# Altium PCB DDR4-UDIMM — 16 GB DDR4.PcbDoc (part 2 of 2)
Units mm, origin at the board's own origin, x right, y up, seen from the top; angles counter-clockwise.
Board outline 133.35 x 31.25 mm, 8 copper layers (Top Layer 1, L2_PWR_GND, L3_DQ_ADDR, L4_VDD, L5_ADDR, L6_ADDR_CK, L7_PWR_GND, Bottom Layer 1), stack 1.398 mm thick; 206 components, 228 nets, 1312 pads, 481 vias.
Unrouted connection lines stored in the file: 1002.
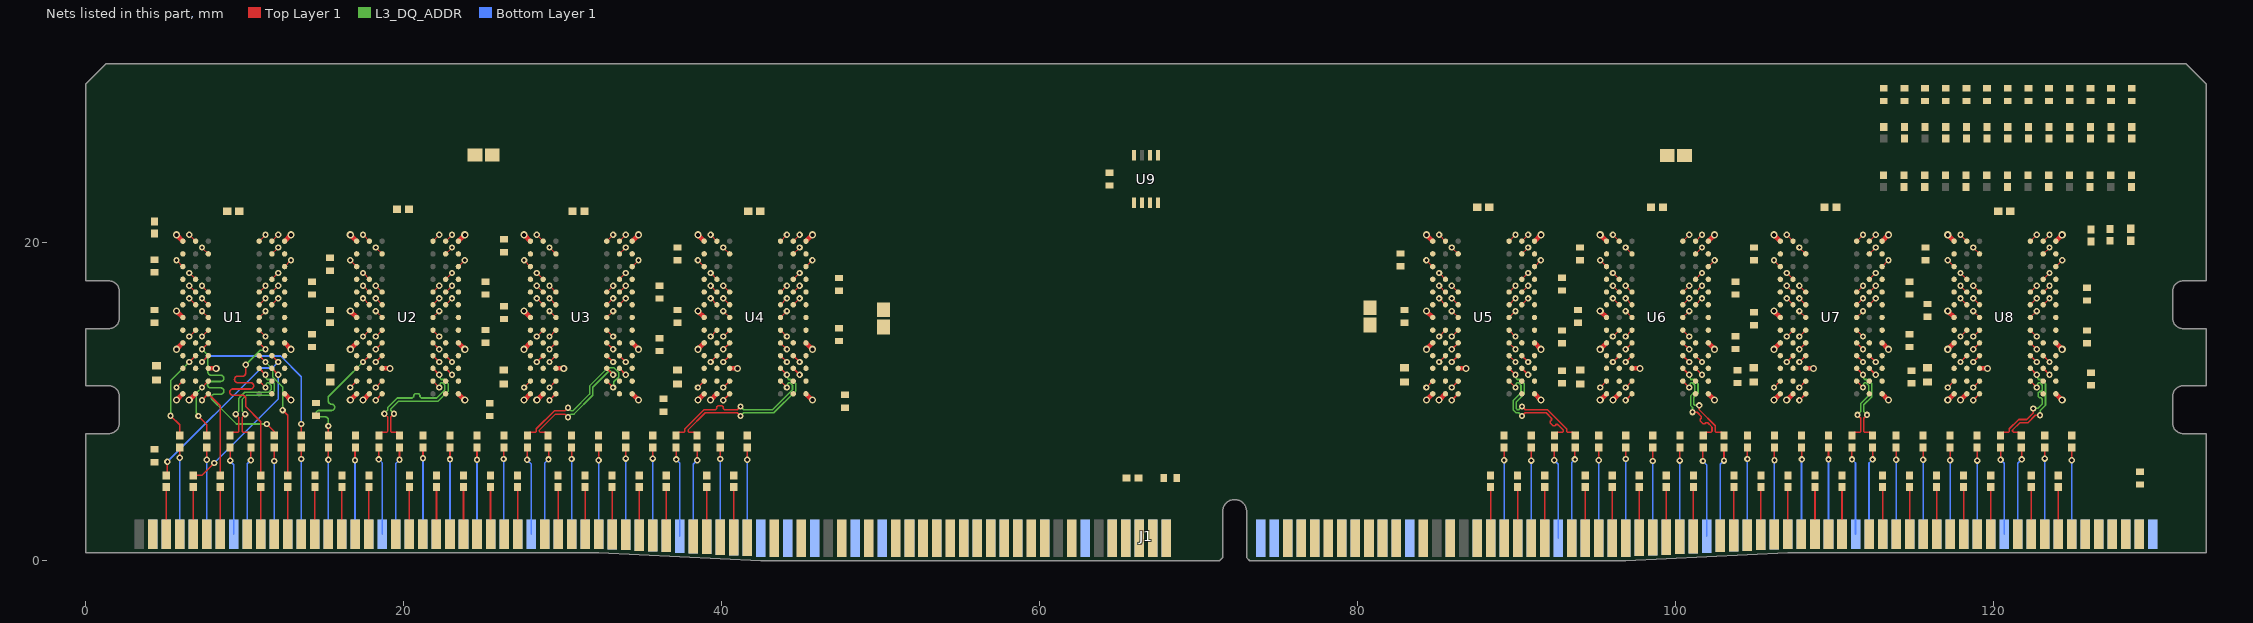
[diagram p4: the nets of this part, all layers, seen from the top]

## Via types
v1: diameter 0.4, hole 0.2, Top Layer 1 to Bottom Layer 1, tented both sides, 409 vias
v2: diameter 0.45, hole 0.25, Top Layer 1 to Bottom Layer 1, tented both sides, 72 vias

## Nets (pads, with @x,y where several pads share a name; then routed paths per layer and width w, separated by ;. In a path a pad name is that pad's centre, name@x,y a point inside that pad or via, vN(x,y) a via of type N, cw(c..) or ccw(c..) an arc to the next point about the centre after c; other vN are vias at no path point) (continued)
A8: J1.68 R116.1 U1.M2 U2.M2 U3.M2 U4.M2 U5.M2 U6.M2 U7.M2 U8.M2 | length 4.5
  Top Layer 1 w0.075: U1.M2@11.7,19.3 v1(12.1,19.7) ; U2.M2@22.63,19.3 v1(23.03,19.7) ; U3.M2@33.56,19.3 v1(33.96,19.7) ; U4.M2@44.49,19.3 v1(44.89,19.7) ; U5.M2@90.31,19.3 v1(90.71,19.7) ; U6.M2@101.24,19.3 v1(101.64,19.7) ; U7.M2@112.17,19.3 v1(112.57,19.7) ; U8.M2@123.1,19.3 v1(123.5,19.7)
A9: J1.66 R119.1 U1.M7 U2.M7 U3.M7 U4.M7 U5.M7 U6.M7 U7.M7 U8.M7 | length 4.5
  Top Layer 1 w0.075: v1(7.3,19.7) U1.M7@7.7,19.3 ; v1(18.23,19.7) U2.M7@18.63,19.3 ; v1(29.16,19.7) U3.M7@29.56,19.3 ; v1(40.09,19.7) U4.M7@40.49,19.3 ; v1(85.91,19.7) U5.M7@86.31,19.3 ; v1(96.84,19.7) U6.M7@97.24,19.3 ; v1(107.77,19.7) U7.M7@108.17,19.3 ; v1(118.7,19.7) U8.M7@119.1,19.3
A10_AP: J1.225 R121.1 U1.J3 U2.J3 U3.J3 U4.J3 U5.J3 U6.J3 U7.J3 U8.J3 | length 4.5
  Top Layer 1 w0.075: U1.J3@10.9,16.9 v1(11.3,17.3) ; U2.J3@21.83,16.9 v1(22.23,17.3) ; U3.J3@32.76,16.9 v1(33.16,17.3) ; U4.J3@43.69,16.9 v1(44.09,17.3) ; U5.J3@89.51,16.9 v1(89.91,17.3) ; U6.J3@100.44,16.9 v1(100.84,17.3) ; U7.J3@111.37,16.9 v1(111.77,17.3) ; U8.J3@122.3,16.9 v1(122.7,17.3)
A11: J1.210 R122.1 U1.N2 U2.N2 U3.N2 U4.N2 U5.N2 U6.N2 U7.N2 U8.N2 | length 4.5
  Top Layer 1 w0.075: U1.N2@11.7,20.1 v1(12.1,20.5) ; U2.N2@22.63,20.1 v1(23.03,20.5) ; U3.N2@33.56,20.1 v1(33.96,20.5) ; U4.N2@44.49,20.1 v1(44.89,20.5) ; U5.N2@90.31,20.1 v1(90.71,20.5) ; U6.N2@101.24,20.1 v1(101.64,20.5) ; U7.N2@112.17,20.1 v1(112.57,20.5) ; U8.N2@123.1,20.1 v1(123.5,20.5)
A12_BC: J1.65 R123.1 U1.J7 U2.J7 U3.J7 U4.J7 U5.J7 U6.J7 U7.J7 U8.J7 | length 4.5
  Top Layer 1 w0.075: v1(7.3,17.3) U1.J7@7.7,16.9 ; v1(18.23,17.3) U2.J7@18.63,16.9 ; v1(29.16,17.3) U3.J7@29.56,16.9 ; v1(40.09,17.3) U4.J7@40.49,16.9 ; v1(85.91,17.3) U5.J7@86.31,16.9 ; v1(96.84,17.3) U6.J7@97.24,16.9 ; v1(107.77,17.3) U7.J7@108.17,16.9 ; v1(118.7,17.3) U8.J7@119.1,16.9
A13: J1.232 R124.1 U1.N8 U2.N8 U3.N8 U4.N8 U5.N8 U6.N8 U7.N8 U8.N8 | length 4.5
  Top Layer 1 w0.075: v1(6.5,20.5) U1.N8@6.9,20.1 ; v1(17.43,20.5) U2.N8@17.83,20.1 ; v1(28.36,20.5) U3.N8@28.76,20.1 ; v1(39.29,20.5) U4.N8@39.69,20.1 ; v1(85.11,20.5) U5.N8@85.51,20.1 ; v1(96.04,20.5) U6.N8@96.44,20.1 ; v1(106.97,20.5) U7.N8@107.37,20.1 ; v1(117.9,20.5) U8.N8@118.3,20.1
A15_CAS: J1.86 R111.1 U1.H7 U2.H7 U3.H7 U4.H7 U5.H7 U6.H7 U7.H7 U8.H7 | length 4.5
  Top Layer 1 w0.075: v1(7.3,16.5) U1.H7@7.7,16.1 ; v1(18.23,16.5) U2.H7@18.63,16.1 ; v1(29.16,16.5) U3.H7@29.56,16.1 ; v1(40.09,16.5) U4.H7@40.49,16.1 ; v1(85.91,16.5) U5.H7@86.31,16.1 ; v1(96.84,16.5) U6.H7@97.24,16.1 ; v1(107.77,16.5) U7.H7@108.17,16.1 ; v1(118.7,16.5) U8.H7@119.1,16.1
A16_RAS: J1.82 R113.1 U1.H8 U2.H8 U3.H8 U4.H8 U5.H8 U6.H8 U7.H8 U8.H8 | length 4.5
  Top Layer 1 w0.075: v1(6.5,16.5) U1.H8@6.9,16.1 ; v1(17.43,16.5) U2.H8@17.83,16.1 ; v1(28.36,16.5) U3.H8@28.76,16.1 ; v1(39.29,16.5) U4.H8@39.69,16.1 ; v1(85.11,16.5) U5.H8@85.51,16.1 ; v1(96.04,16.5) U6.H8@96.44,16.1 ; v1(106.97,16.5) U7.H8@107.37,16.1 ; v1(117.9,16.5) U8.H8@118.3,16.1
ACT: J1.62 R125.1 U1.H3 U2.H3 U3.H3 U4.H3 U5.H3 U6.H3 U7.H3 U8.H3 | length 4.5
  Top Layer 1 w0.075: U1.H3@10.9,16.1 v1(11.3,16.5) ; U2.H3@21.83,16.1 v1(22.23,16.5) ; U3.H3@32.76,16.1 v1(33.16,16.5) ; U4.H3@43.69,16.1 v1(44.09,16.5) ; U5.H3@89.51,16.1 v1(89.91,16.5) ; U6.H3@100.44,16.1 v1(100.84,16.5) ; U7.H3@111.37,16.1 v1(111.77,16.5) ; U8.H3@122.3,16.1 v1(122.7,16.5)
ALERT_n: J1.208 R102.1 U1.L9 U2.L9 U3.L9 U4.L9 U5.L9 U6.L9 U7.L9 U8.L9 | length 4.5
  Top Layer 1 w0.075: v1(5.7,18.9) U1.L9@6.1,18.5 ; v1(16.63,18.9) U2.L9@17.03,18.5 ; v1(27.56,18.9) U3.L9@27.96,18.5 ; v1(38.49,18.9) U4.L9@38.89,18.5 ; v1(84.31,18.9) U5.L9@84.71,18.5 ; v1(95.24,18.9) U6.L9@95.64,18.5 ; v1(106.17,18.9) U7.L9@106.57,18.5 ; v1(117.1,18.9) U8.L9@117.5,18.5
BA0: J1.81 R118.1 U1.K2 U2.K2 U3.K2 U4.K2 U5.K2 U6.K2 U7.K2 U8.K2 | length 4.5
  Top Layer 1 w0.075: U1.K2@11.7,17.7 v1(12.1,18.1) ; U2.K2@22.63,17.7 v1(23.03,18.1) ; U3.K2@33.56,17.7 v1(33.96,18.1) ; U4.K2@44.49,17.7 v1(44.89,18.1) ; U5.K2@90.31,17.7 v1(90.71,18.1) ; U6.K2@101.24,17.7 v1(101.64,18.1) ; U7.K2@112.17,17.7 v1(112.57,18.1) ; U8.K2@123.1,17.7 v1(123.5,18.1)
BA1: J1.224 R120.1 U1.K8 U2.K8 U3.K8 U4.K8 U5.K8 U6.K8 U7.K8 U8.K8 | length 4.5
  Top Layer 1 w0.075: v1(6.5,18.1) U1.K8@6.9,17.7 ; v1(17.43,18.1) U2.K8@17.83,17.7 ; v1(28.36,18.1) U3.K8@28.76,17.7 ; v1(39.29,18.1) U4.K8@39.69,17.7 ; v1(85.11,18.1) U5.K8@85.51,17.7 ; v1(96.04,18.1) U6.K8@96.44,17.7 ; v1(106.97,18.1) U7.K8@107.37,17.7 ; v1(117.9,18.1) U8.K8@118.3,17.7
BG0: J1.63 R99.1 U1.J2 U2.J2 U3.J2 U4.J2 U5.J2 U6.J2 U7.J2 U8.J2 | length 4.5
  Top Layer 1 w0.075: U1.J2@11.7,16.9 v1(12.1,17.3) ; U2.J2@22.63,16.9 v1(23.03,17.3) ; U3.J2@33.56,16.9 v1(33.96,17.3) ; U4.J2@44.49,16.9 v1(44.89,17.3) ; U5.J2@90.31,16.9 v1(90.71,17.3) ; U6.J2@101.24,16.9 v1(101.64,17.3) ; U7.J2@112.17,16.9 v1(112.57,17.3) ; U8.J2@123.1,16.9 v1(123.5,17.3)
BG1: J1.207 R98.1 U1.J8 U2.J8 U3.J8 U4.J8 U5.J8 U6.J8 U7.J8 U8.J8 | length 4.5
  Top Layer 1 w0.075: v1(6.5,17.3) U1.J8@6.9,16.9 ; v1(17.43,17.3) U2.J8@17.83,16.9 ; v1(28.36,17.3) U3.J8@28.76,16.9 ; v1(39.29,17.3) U4.J8@39.69,16.9 ; v1(85.11,17.3) U5.J8@85.51,16.9 ; v1(96.04,17.3) U6.J8@96.44,16.9 ; v1(106.97,17.3) U7.J8@107.37,16.9 ; v1(117.9,17.3) U8.J8@118.3,16.9
CK0_C: J1.75 R117.1 U1.F8 U2.F8 U3.F8 U4.F8 U5.F8 U6.F8 U7.F8 U8.F8 | length 4.5
  Top Layer 1 w0.075: v1(6.5,14.1) U1.F8@6.9,14.5 ; v1(17.43,14.1) U2.F8@17.83,14.5 ; v1(28.36,14.1) U3.F8@28.76,14.5 ; v1(39.29,14.1) U4.F8@39.69,14.5 ; v1(85.11,14.1) U5.F8@85.51,14.5 ; v1(96.04,14.1) U6.F8@96.44,14.5 ; v1(106.97,14.1) U7.F8@107.37,14.5 ; v1(117.9,14.1) U8.F8@118.3,14.5
CK0_T: J1.74 R115.1 U1.F7 U2.F7 U3.F7 U4.F7 U5.F7 U6.F7 U7.F7 U8.F7 | length 4.5
  Top Layer 1 w0.075: v1(7.3,14.1) U1.F7@7.7,14.5 ; v1(18.23,14.1) U2.F7@18.63,14.5 ; v1(29.16,14.1) U3.F7@29.56,14.5 ; v1(40.09,14.1) U4.F7@40.49,14.5 ; v1(85.91,14.1) U5.F7@86.31,14.5 ; v1(96.84,14.1) U6.F7@97.24,14.5 ; v1(107.77,14.1) U7.F7@108.17,14.5 ; v1(118.7,14.1) U8.F7@119.1,14.5
CK1_C: J1.219 R106.2
CK1_T: J1.218 R106.1
CKE: J1.60 R104.1 U1.G3 U2.G3 U3.G3 U4.G3 U5.G3 U6.G3 U7.G3 U8.G3 | length 4.5
  Top Layer 1 w0.075: U1.G3@10.9,15.3 v1(11.3,15.7) ; U2.G3@21.83,15.3 v1(22.23,15.7) ; U3.G3@32.76,15.3 v1(33.16,15.7) ; U4.G3@43.69,15.3 v1(44.09,15.7) ; U5.G3@89.51,15.3 v1(89.91,15.7) ; U6.G3@100.44,15.3 v1(100.84,15.7) ; U7.G3@111.37,15.3 v1(111.77,15.7) ; U8.G3@122.3,15.3 v1(122.7,15.7)
CS: J1.84 R101.1 U1.G7 U2.G7 U3.G7 U4.G7 U5.G7 U6.G7 U7.G7 U8.G7 | length 4.5
  Top Layer 1 w0.075: v1(7.3,15.7) U1.G7@7.7,15.3 ; v1(18.23,15.7) U2.G7@18.63,15.3 ; v1(29.16,15.7) U3.G7@29.56,15.3 ; v1(40.09,15.7) U4.G7@40.49,15.3 ; v1(85.91,15.7) U5.G7@86.31,15.3 ; v1(96.84,15.7) U6.G7@97.24,15.3 ; v1(107.77,15.7) U7.G7@108.17,15.3 ; v1(118.7,15.7) U8.G7@119.1,15.3
DM0: J1.7 R11.2 | length 2.9
  Top Layer 1 w0.1: J1.7@8.45,1.675 R11.2@8.45,4.625
DM1: J1.18 R23.2 | length 2.9
  Top Layer 1 w0.1: J1.18@17.8,1.675 R23.2@17.8,4.625
DM2: J1.29 R35.2 | length 2.9
  Top Layer 1 w0.1: J1.29@27.15,1.675 R35.2@27.15,4.625
DM3: J1.40 R47.2 | length 3.1
  Top Layer 1 w0.1: J1.40@36.5,1.571 R47.2@36.5,4.625
DM4: J1.99 R59.2 | length 3.2
  Top Layer 1 w0.1: J1.99@91.75,1.425 R59.2@91.75,4.625
DM5: J1.110 R71.2 | length 3.1
  Top Layer 1 w0.1: J1.110@101.1,1.529 R71.2@101.1,4.625
DM6: J1.121 R83.2 | length 2.9
  Top Layer 1 w0.1: J1.121@110.45,1.675 R83.2@110.45,4.625
DM7: J1.132 R95.2 | length 2.9
  Top Layer 1 w0.1: J1.132@119.8,1.675 R95.2@119.8,4.625
DQ0: J1.5 R2.2 | length 2.9
  Top Layer 1 w0.1: J1.5@6.75,1.675 R2.2@6.75,4.625
DQ1: J1.150 R3.2 | length 5.4
  Top Layer 1 w0.1: v1(7.6,6.35) R3.2@7.6,7.125
  Bottom Layer 1 w0.1: J1.150@7.6,1.675 v1(7.6,6.35)
DQ2: J1.12 R4.2 | length 2.9
  Top Layer 1 w0.1: J1.12@12.7,1.675 R4.2@12.7,4.625
DQ3: J1.157 R5.2 | length 5.4
  Top Layer 1 w0.1: v1(13.55,6.4) R5.2@13.55,7.125
  Bottom Layer 1 w0.1: J1.157@13.55,1.675 v1(13.55,6.4)
DQ4: J1.3 R6.2 | length 2.9
  Top Layer 1 w0.1: J1.3@5.05,1.675 R6.2@5.05,4.625
DQ5: J1.148 R12.2 | length 5.4
  Top Layer 1 w0.1: v1(5.9,6.475) R12.2@5.9,7.125
  Bottom Layer 1 w0.1: J1.148@5.9,1.675 v1(5.9,6.475)
DQ6: J1.10 R7.2 | length 2.9
  Top Layer 1 w0.1: J1.10@11,1.675 R7.2@11,4.625
DQ7: J1.155 R8.2 | length 5.4
  Top Layer 1 w0.1: v1(11.85,6.275) R8.2@11.85,7.125
  Bottom Layer 1 w0.1: J1.155@11.85,1.675 v1(11.85,6.275)
DQ8: J1.16 R14.2 | length 2.9
  Top Layer 1 w0.1: J1.16@16.1,1.675 R14.2@16.1,4.625
DQ9: J1.161 R15.2 | length 5.5
  Top Layer 1 w0.1: v1(16.925,6.325) 16.925,7.1 R15.2@16.95,7.125
  Bottom Layer 1 w0.1: v1(16.925,6.325) 16.925,1.7 J1.161@16.95,1.675
DQ10: J1.23 R16.2 | length 2.9
  Top Layer 1 w0.1: J1.23@22.05,1.675 R16.2@22.05,4.625
DQ11: J1.168 R17.2 | length 5.4
  Top Layer 1 w0.1: v1(22.9,6.375) R17.2@22.9,7.125
  Bottom Layer 1 w0.1: J1.168@22.9,1.675 v1(22.9,6.375)
DQ12: J1.14 R18.2 | length 2.9
  Top Layer 1 w0.1: J1.14@14.4,1.675 R18.2@14.4,4.625
DQ13: J1.159 R24.2 | length 5.4
  Top Layer 1 w0.1: v1(15.25,6.35) R24.2@15.25,7.125
  Bottom Layer 1 w0.1: J1.159@15.25,1.675 v1(15.25,6.35)
DQ14: J1.21 R19.2 | length 2.9
  Top Layer 1 w0.1: J1.21@20.35,1.675 R19.2@20.35,4.625
DQ15: J1.166 R20.2 | length 5.4
  Top Layer 1 w0.1: v1(21.2,6.45) R20.2@21.2,7.125
  Bottom Layer 1 w0.1: J1.166@21.2,1.675 v1(21.2,6.45)
DQ16: J1.27 R26.2 | length 2.9
  Top Layer 1 w0.1: J1.27@25.45,1.675 R26.2@25.45,4.625
DQ17: J1.172 R27.2 | length 5.5
  Top Layer 1 w0.1: v1(26.275,6.4) 26.275,7.1 R27.2@26.3,7.125
  Bottom Layer 1 w0.1: v1(26.275,6.4) 26.275,1.7 J1.172@26.3,1.675
DQ18: J1.34 R28.2 | length 2.9
  Top Layer 1 w0.1: J1.34@31.4,1.675 R28.2@31.4,4.625
DQ19: J1.179 R29.2 | length 5.4
  Top Layer 1 w0.1: v1(32.25,6.325) R29.2@32.25,7.125
  Bottom Layer 1 w0.1: J1.179@32.25,1.675 v1(32.25,6.325)
DQ20: J1.25 R30.2 | length 2.9
  Top Layer 1 w0.1: J1.25@23.75,1.675 R30.2@23.75,4.625
DQ21: J1.170 R36.2 | length 5.4
  Top Layer 1 w0.1: v1(24.6,6.35) R36.2@24.6,7.125
  Bottom Layer 1 w0.1: J1.170@24.6,1.675 v1(24.6,6.35)
DQ22: J1.32 R31.2 | length 2.9
  Top Layer 1 w0.1: J1.32@29.7,1.675 R31.2@29.7,4.625
DQ23: J1.177 R32.2 | length 5.4
  Top Layer 1 w0.1: v1(30.55,6.4) R32.2@30.55,7.125
  Bottom Layer 1 w0.1: J1.177@30.55,1.675 v1(30.55,6.4)
DQ24: J1.38 R38.2 | length 3
  Top Layer 1 w0.1: J1.38@34.8,1.613 R38.2@34.8,4.625
DQ25: J1.183 R39.2 | length 5.5
  Top Layer 1 w0.1: v1(35.65,6.425) R39.2@35.65,7.125
  Bottom Layer 1 w0.1: J1.183@35.65,1.592 v1(35.65,6.425)
DQ26: J1.45 R40.2 | length 3.2
  Top Layer 1 w0.1: J1.45@40.75,1.467 R40.2@40.75,4.625
DQ27: J1.190 R41.2 | length 5.7
  Top Layer 1 w0.1: v1(41.6,6.35) R41.2@41.6,7.125
  Bottom Layer 1 w0.1: J1.190@41.6,1.446 v1(41.6,6.35)
DQ28: J1.36 R42.2 | length 3
  Top Layer 1 w0.1: J1.36@33.1,1.654 R42.2@33.1,4.625
DQ29: J1.181 R48.2 | length 5.5
  Top Layer 1 w0.1: v1(33.95,6.425) R48.2@33.95,7.125
  Bottom Layer 1 w0.1: J1.181@33.95,1.633 v1(33.95,6.425)
DQ30: J1.43 R43.2 | length 3.1
  Top Layer 1 w0.1: J1.43@39.05,1.508 R43.2@39.05,4.625
DQ31: J1.188 R44.2 | length 5.6
  Top Layer 1 w0.1: v1(39.9,6.4) R44.2@39.9,7.125
  Bottom Layer 1 w0.1: J1.188@39.9,1.488 v1(39.9,6.4)
DQ32: J1.97 R50.2 | length 3.2
  Top Layer 1 w0.1: J1.97@90.05,1.425 R50.2@90.05,4.625
DQ33: J1.242 R51.2 | length 5.7
  Top Layer 1 w0.1: v1(90.9,6.3) R51.2@90.9,7.125
  Bottom Layer 1 w0.1: J1.242@90.9,1.425 v1(90.9,6.3)
DQ34: J1.104 R52.2 | length 3.2
  Top Layer 1 w0.1: J1.104@96,1.425 R52.2@96,4.625
DQ35: J1.249 R53.2 | length 5.7
  Top Layer 1 w0.1: v1(96.85,6.4) R53.2@96.85,7.125
  Bottom Layer 1 w0.1: J1.249@96.85,1.425 v1(96.85,6.4)
DQ36: J1.95 R54.2 | length 3.2
  Top Layer 1 w0.1: J1.95@88.35,1.425 R54.2@88.35,4.625
DQ37: J1.240 R60.2 | length 5.7
  Top Layer 1 w0.1: v1(89.2,6.325) R60.2@89.2,7.125
  Bottom Layer 1 w0.1: J1.240@89.2,1.425 v1(89.2,6.325)
DQ38: J1.102 R55.2 | length 3.2
  Top Layer 1 w0.1: J1.102@94.3,1.425 R55.2@94.3,4.625
DQ39: J1.247 R56.2 | length 5.7
  Top Layer 1 w0.1: v1(95.15,6.325) R56.2@95.15,7.125
  Bottom Layer 1 w0.1: J1.247@95.15,1.425 v1(95.15,6.325)
DQ40: J1.108 R62.2 | length 3.1
  Top Layer 1 w0.1: J1.108@99.4,1.488 R62.2@99.4,4.625
DQ41: J1.253 R63.2 | length 5.6
  Top Layer 1 w0.1: v1(100.25,6.3) R63.2@100.25,7.125
  Bottom Layer 1 w0.1: J1.253@100.25,1.508 v1(100.25,6.3)
DQ42: J1.115 R64.2 | length 3
  Top Layer 1 w0.1: J1.115@105.35,1.633 R64.2@105.35,4.625
DQ43: J1.260 R65.2 | length 5.5
  Top Layer 1 w0.1: v1(106.2,6.325) R65.2@106.2,7.125
  Bottom Layer 1 w0.1: J1.260@106.2,1.654 v1(106.2,6.325)
DQ44: J1.106 R66.2 | length 3.2
  Top Layer 1 w0.1: J1.106@97.7,1.446 R66.2@97.7,4.625
DQ45: J1.251 R72.2 | length 5.7
  Top Layer 1 w0.1: v1(98.55,6.275) R72.2@98.55,7.125
  Bottom Layer 1 w0.1: J1.251@98.55,1.467 v1(98.55,6.275)
DQ46: J1.113 R67.2 | length 3
  Top Layer 1 w0.1: J1.113@103.65,1.592 R67.2@103.65,4.625
DQ47: J1.258 R68.2 | length 5.5
  Top Layer 1 w0.1: v1(104.5,6.4) R68.2@104.5,7.125
  Bottom Layer 1 w0.1: J1.258@104.5,1.613 v1(104.5,6.4)
DQ48: J1.119 R74.2 | length 2.9
  Top Layer 1 w0.1: J1.119@108.75,1.675 R74.2@108.75,4.625
DQ49: J1.264 R75.2 | length 5.4
  Top Layer 1 w0.1: v1(109.6,6.375) R75.2@109.6,7.125
  Bottom Layer 1 w0.1: J1.264@109.6,1.675 v1(109.6,6.375)
DQ50: J1.126 R76.2 | length 2.9
  Top Layer 1 w0.1: J1.126@114.7,1.675 R76.2@114.7,4.625
DQ51: J1.271 R77.2 | length 5.4
  Top Layer 1 w0.1: v1(115.55,6.35) R77.2@115.55,7.125
  Bottom Layer 1 w0.1: J1.271@115.55,1.675 v1(115.55,6.35)
DQ52: J1.117 R78.2 | length 2.9
  Top Layer 1 w0.1: J1.117@107.05,1.675 R78.2@107.05,4.625
DQ53: J1.262 R84.2 | length 5.5
  Top Layer 1 w0.1: R84.2@107.9,7.125 107.925,7.1 v1(107.925,6.375)
  Bottom Layer 1 w0.1: J1.262@107.9,1.675 107.9,6.35 v1(107.925,6.375)
DQ54: J1.124 R79.2 | length 2.9
  Top Layer 1 w0.1: J1.124@113,1.675 R79.2@113,4.625
DQ55: J1.269 R80.2 | length 5.4
  Top Layer 1 w0.1: v1(113.85,6.35) R80.2@113.85,7.125
  Bottom Layer 1 w0.1: J1.269@113.85,1.675 v1(113.85,6.35)
DQ56: J1.130 R86.2 | length 2.9
  Top Layer 1 w0.1: J1.130@118.1,1.675 R86.2@118.1,4.625
DQ57: J1.275 R87.2 | length 5.4
  Top Layer 1 w0.1: v1(118.95,6.3) R87.2@118.95,7.125
  Bottom Layer 1 w0.1: J1.275@118.95,1.675 v1(118.95,6.3)
DQ58: J1.137 R88.2 | length 2.9
  Top Layer 1 w0.1: J1.137@124.05,1.675 R88.2@124.05,4.625
DQ59: J1.282 R89.2 | length 5.4
  Top Layer 1 w0.1: v1(124.9,6.325) R89.2@124.9,7.125
  Bottom Layer 1 w0.1: J1.282@124.9,1.675 v1(124.9,6.325)
DQ60: J1.128 R90.2 | length 2.9
  Top Layer 1 w0.1: J1.128@116.4,1.675 R90.2@116.4,4.625
DQ61: J1.273 R96.2 | length 5.4
  Top Layer 1 w0.1: v1(117.25,6.325) R96.2@117.25,7.125
  Bottom Layer 1 w0.1: J1.273@117.25,1.675 v1(117.25,6.325)
DQ62: J1.135 R91.2 | length 2.9
  Top Layer 1 w0.1: J1.135@122.35,1.675 R91.2@122.35,4.625
DQ63: J1.280 R92.2 | length 5.4
  Top Layer 1 w0.1: v1(123.2,6.425) R92.2@123.2,7.125
  Bottom Layer 1 w0.1: J1.280@123.2,1.675 v1(123.2,6.425)
DQS0_C: J1.152 R10.2 | length 5.5
  Top Layer 1 w0.1: v1(9.075,6.3) R10.2@9.075,7.125
  Bottom Layer 1 w0.1: v1(9.075,6.3) 9.075,6.255 9.3,6.03 J1.152@9.3,1.675
DQS0_T: J1.153 R9.2 | length 5.5
  Top Layer 1 w0.1: v1(10.375,6.325) R9.2@10.375,7.125
  Bottom Layer 1 w0.1: J1.153@10.15,1.675 10.15,6.1 v1(10.375,6.325)
DQS1_C: J1.163 R22.2 | length 5.5
  Top Layer 1 w0.1: v1(18.425,6.375) R22.2@18.425,7.125
  Bottom Layer 1 w0.1: v1(18.425,6.375) 18.65,6.15 J1.163@18.65,1.675
DQS1_T: J1.164 R21.2 | length 5.5
  Top Layer 1 w0.1: v1(19.725,6.35) R21.2@19.725,7.125
  Bottom Layer 1 w0.1: J1.164@19.5,1.675 19.5,6.125 v1(19.725,6.35)
DQS2_C: J1.174 R34.2 | length 5.6
  Top Layer 1 w0.1: v1(27.75,6.35) 27.75,7.1 R34.2@27.775,7.125
  Bottom Layer 1 w0.1: v1(27.75,6.35) 28,6.1 J1.174@28,1.675
DQS2_T: J1.175 R33.2 | length 5.6
  Top Layer 1 w0.1: R33.2@29.075,7.125 29.1,7.1 v1(29.1,6.375)
  Bottom Layer 1 w0.1: J1.175@28.85,1.675 28.85,6.125 v1(29.1,6.375)
DQS3_C: J1.185 R46.2 | length 5.7
  Top Layer 1 w0.1: v1(37.125,6.375) R46.2@37.125,7.125
  Bottom Layer 1 w0.1: v1(37.125,6.375) 37.35,6.15 J1.185@37.35,1.55
DQS3_T: J1.186 R45.2 | length 5.7
  Top Layer 1 w0.1: R45.2@38.425,7.125 38.45,7.1 v1(38.45,6.325)
  Bottom Layer 1 w0.1: J1.186@38.2,1.529 38.2,6.075 v1(38.45,6.325)
DQS4_C: J1.244 R58.2 | length 5.8
  Top Layer 1 w0.1: v1(92.35,6.325) 92.35,7.1 R58.2@92.375,7.125
  Bottom Layer 1 w0.1: v1(92.35,6.325) 92.6,6.075 J1.244@92.6,1.425
DQS4_T: J1.245 R57.2 | length 5.8
  Top Layer 1 w0.1: v1(93.65,6.375) 93.65,7.1 R57.2@93.675,7.125
  Bottom Layer 1 w0.1: J1.245@93.45,1.425 93.45,6.175 v1(93.65,6.375)
DQS5_C: J1.255 R70.2 | length 5.7
  Top Layer 1 w0.1: v1(101.7,6.275) 101.7,7.1 R70.2@101.725,7.125
  Bottom Layer 1 w0.1: v1(101.7,6.275) 101.95,6.025 J1.255@101.95,1.55
DQS5_T: J1.256 R69.2 | length 5.6
  Top Layer 1 w0.1: v1(103.025,6.3) R69.2@103.025,7.125
  Bottom Layer 1 w0.1: J1.256@102.8,1.571 102.8,6.075 v1(103.025,6.3)
DQS6_C: J1.266 R82.2 | length 5.5
  Top Layer 1 w0.1: v1(111.075,6.375) R82.2@111.075,7.125
  Bottom Layer 1 w0.1: v1(111.075,6.375) 111.3,6.15 J1.266@111.3,1.675
DQS6_T: J1.267 R81.2 | length 5.5
  Top Layer 1 w0.1: v1(112.375,6.375) R81.2@112.375,7.125
  Bottom Layer 1 w0.1: J1.267@112.15,1.675 112.15,6.15 v1(112.375,6.375)
DQS7_C: J1.277 R94.2 | length 5.5
  Top Layer 1 w0.1: v1(120.425,6.35) R94.2@120.425,7.125
  Bottom Layer 1 w0.1: v1(120.425,6.35) 120.65,6.125 J1.277@120.65,1.675
DQS7_T: J1.278 R93.2 | length 5.6
  Top Layer 1 w0.1: R93.2@121.725,7.125 121.75,7.1 v1(121.75,6.375)
  Bottom Layer 1 w0.1: J1.278@121.5,1.675 121.5,6.125 v1(121.75,6.375)
GND: C2.1 C3.1 C4.2 C5.1 C6.1 C8.1 C9.1 C10.2 C11.1 C12.1 C14.1 C15.1 C16.2 C17.1 C18.1 C20.1 C21.1 C22.2 C23.1 C24.1 C26.1 C27.1 C28.2 C29.1 C30.1 C32.1 C33.1 C34.2 C35.1 C36.1 C38.1 C39.1 C40.2 C41.1 C42.1 C44.1 C45.1 C46.2 C47.1 C48.1 C49.1 C50.1 C51.1 C52.1 C53.1 C55.1 J1.2 J1.4 J1.6 J1.9 J1.11 J1.13 J1.15 J1.17 J1.20 J1.22 J1.24 J1.26 J1.28 J1.31 J1.33 J1.35 J1.37 J1.39 J1.42 J1.44 J1.46 J1.48 J1.50 J1.53 J1.55 J1.57 J1.94 J1.96 J1.98 J1.101 J1.103 J1.105 J1.107 J1.109 J1.112 J1.114 J1.116 J1.118 J1.120 J1.123 J1.125 J1.127 J1.129 J1.131 J1.134 J1.136 J1.138 J1.147 J1.149 J1.151 J1.154 J1.156 J1.158 J1.160 J1.162 J1.165 J1.167 J1.169 J1.171 J1.173 J1.176 J1.178 J1.180 J1.182 J1.184 J1.187 J1.189 J1.191 J1.193 J1.195 J1.198 J1.200 J1.202 J1.239 J1.241 J1.243 J1.246 J1.248 J1.250 J1.252 J1.254 J1.257 J1.259 J1.261 J1.263 J1.265 J1.268 J1.270 J1.272 J1.274 J1.276 J1.279 J1.281 J1.283 R1.2 R13.2 R25.2 R37.2 R49.2 R61.2 R73.2 R85.2 U1.A2 U1.A8 U1.A9 U1.C8 U1.D1 U1.D9 U1.E1 U1.E9 U1.G1 U1.G9 U1.H9 U1.K1 U1.K9 U1.N1 U2.A2 U2.A8 U2.A9 U2.C8 U2.D1 U2.D9 U2.E1 U2.E9 U2.G1 U2.G9 U2.H9 U2.K1 U2.K9 U2.N1 U3.A2 U3.A8 U3.A9 U3.C8 U3.D1 U3.D9 U3.E1 U3.E9 U3.G1 U3.G9 U3.H9 U3.K1 U3.K9 U3.N1 U4.A2 U4.A8 U4.A9 U4.C8 U4.D1 U4.D9 U4.E1 U4.E9 U4.G1 U4.G9 U4.H9 U4.K1 U4.K9 U4.N1 U5.A2 U5.A8 U5.A9 U5.C8 U5.D1 U5.D9 U5.E1 U5.E9 U5.G1 U5.G9 U5.H9 U5.K1 U5.K9 U5.N1 U6.A2 U6.A8 U6.A9 U6.C8 U6.D1 U6.D9 U6.E1 U6.E9 U6.G1 U6.G9 U6.H9 U6.K1 U6.K9 U6.N1 U7.A2 U7.A8 U7.A9 U7.C8 U7.D1 U7.D9 U7.E1 U7.E9 U7.G1 U7.G9 U7.H9 U7.K1 U7.K9 U7.N1 U8.A2 U8.A8 U8.A9 U8.C8 U8.D1 U8.D9 U8.E1 U8.E9 U8.G1 U8.G9 U8.H9 U8.K1 U8.K9 U8.N1 U9.4 | length 27.2
  Top Layer 1 w0.3: v2(5.7,10.1) U1.A9@6.1,10.5 ; v2(5.7,13.3) U1.E9@6.1,13.7 ; v2(5.7,15.7) U1.G9@6.1,15.3 ; v2(6.5,10.1) U1.A8@6.9,10.5 ; U1.E1@12.5,13.7 v2(12.9,13.3) ; U1.N1@12.5,20.1 v2(12.9,20.5) ; v2(16.63,10.1) U2.A9@17.03,10.5 ; v2(16.63,13.3) U2.E9@17.03,13.7 ; v2(16.63,15.7) U2.G9@17.03,15.3 ; v2(17.43,10.1) U2.A8@17.83,10.5 ; U2.E1@23.43,13.7 v2(23.83,13.3) ; U2.N1@23.43,20.1 v2(23.83,20.5) ; v2(27.56,10.1) U3.A9@27.96,10.5 ; v2(27.56,13.3) U3.E9@27.96,13.7 ; v2(27.56,15.7) U3.G9@27.96,15.3 ; v2(28.36,10.1) U3.A8@28.76,10.5 ; U3.E1@34.36,13.7 v2(34.76,13.3) ; U3.N1@34.36,20.1 v2(34.76,20.5) ; v2(38.49,10.1) U4.A9@38.89,10.5 ; v2(38.49,13.3) U4.E9@38.89,13.7 ; v2(38.49,15.7) U4.G9@38.89,15.3 ; v2(39.29,10.1) U4.A8@39.69,10.5 ; U4.E1@45.29,13.7 v2(45.69,13.3) ; U4.N1@45.29,20.1 v2(45.69,20.5) ; v2(84.31,10.1) U5.A9@84.71,10.5 ; v2(84.31,13.3) U5.E9@84.71,13.7 ; v2(84.31,15.7) U5.G9@84.71,15.3 ; v2(85.11,10.1) U5.A8@85.51,10.5 ; U5.E1@91.11,13.7 v2(91.51,13.3) ; U5.N1@91.11,20.1 v2(91.51,20.5) ; v2(95.24,10.1) U6.A9@95.64,10.5 ; v2(95.24,13.3) U6.E9@95.64,13.7 ; v2(95.24,15.7) U6.G9@95.64,15.3 ; v2(96.04,10.1) U6.A8@96.44,10.5 ; U6.E1@102.04,13.7 v2(102.44,13.3) ; U6.N1@102.04,20.1 v2(102.44,20.5) ; v2(106.17,10.1) U7.A9@106.57,10.5 ; v2(106.17,13.3) U7.E9@106.57,13.7 ; v2(106.17,15.7) U7.G9@106.57,15.3 ; v2(106.97,10.1) U7.A8@107.37,10.5 ; U7.E1@112.97,13.7 v2(113.37,13.3) ; U7.N1@112.97,20.1 v2(113.37,20.5) ; v2(117.1,10.1) U8.A9@117.5,10.5 ; v2(117.1,13.3) U8.E9@117.5,13.7 ; v2(117.1,15.7) U8.G9@117.5,15.3 ; v2(117.9,10.1) U8.A8@118.3,10.5 ; U8.E1@123.9,13.7 v2(124.3,13.3) ; U8.N1@123.9,20.1 v2(124.3,20.5)
NetC56_1: C56.1 R115.2 R117.2
NetR1_1: R1.1 U1.B9 | length 0.6
  Top Layer 1 w0.1: v1(5.7,10.9) U1.B9@6.1,11.3
NetR2_1: R2.1 U1.C2 | length 9.4
  Top Layer 1 w0.1: R2.1@6.75,5.375 7.3,5.375 v1(8.075,6.15) ; U1.C2@11.7,12.1 v1(12.1,11.7)
  Bottom Layer 1 w0.1: v1(8.075,6.15) 12.1,10.175 v1(12.1,11.7)
NetR3_1: R3.1 U1.B7 | length 4
  Top Layer 1 w0.1: v1(7.075,9.1) 7.6,8.575 R3.1@7.6,7.875 ; v1(7.3,10.9) U1.B7@7.7,11.3
  L3_DQ_ADDR w0.1: v1(7.075,9.1) 7.075,9.181 6.95,9.306 6.95,10.55 v1(7.3,10.9)
NetR4_1: R4.1 U1.D3 | length 8.3
  Top Layer 1 w0.1: U1.D3@10.9,12.9 v1(11.3,12.5) ; v1(12.375,9.475) 12.7,9.15 R4.1@12.7,5.375
  L3_DQ_ADDR w0.1: v1(11.3,12.5) 11.75,12.05 11.75,11.555 12.375,10.93 v1(12.375,9.475)
NetR5_1: R5.1 U1.D7 | length 11.2
  Top Layer 1 w0.1: v1(7.3,12.5) U1.D7@7.7,12.9 ; R5.1@13.55,7.875 v1(13.55,8.6)
  Bottom Layer 1 w0.1: v1(7.3,12.5) 7.675,12.875 12.25,12.875 13.55,11.575 v1(13.55,8.6)
NetR6_1: R6.1 U1.D2 | length 11
  Top Layer 1 w0.1: R6.1@5.05,5.375 5.125,5.45 v1(5.125,6.225) ; U1.D2@11.7,12.9 v1(12.1,12.5)
  Bottom Layer 1 w0.1: v1(5.125,6.225) 11.025,12.125 11.725,12.125 v1(12.1,12.5)
NetR7_1: R7.1 U1.E3 | length 13.3
  Top Layer 1 w0.1: v1(10.05,12.325) 10.05,12.125 10.05,11.805 cw(c9.85,11.805) 9.85,11.605 9.546,11.605 ccw(c9.546,11.405) 9.546,11.205 10.355,11.205 cw(c10.355,11.005) 10.355,10.805 9.25,10.805 ccw(c9.25,10.605) 9.25,10.405 9.85,10.405 cw(c9.85,10.205) 10.05,10.205 10.05,10.155 10.05,9.695 11,8.745 R7.1@11,5.375 ; U1.E3@10.9,13.7 v1(11.3,13.3)
  L3_DQ_ADDR w0.1: v1(10.05,12.325) 10.968,13.243 11.243,13.243 v1(11.3,13.3)
NetR8_1: R8.1 U1.E7 | length 12
  Top Layer 1 w0.1: v1(7.3,13.3) U1.E7@7.7,13.7 ; v1(11.375,8.6) 11.85,8.125 R8.1@11.85,7.875
  L3_DQ_ADDR w0.1: v1(7.3,13.3) 7.675,12.925 7.675,11.924 7.675,11.874 ccw(c7.875,11.874) 7.875,11.674 8.475,11.674 cw(c8.475,11.474) 8.475,11.274 7.85,11.274 ccw(c7.85,11.074) 7.85,10.874 8.475,10.874 cw(c8.475,10.674) 8.475,10.474 8.084,10.474 ccw(c8.084,10.274) 7.942,10.133 8.691,9.384 9.475,8.6 v1(11.375,8.6)
NetR9_1: R9.1 U1.C3 | length 7
  Top Layer 1 w0.1: v1(10.025,9.225) 10.025,9.216 9.825,9.016 9.825,8.55 9.825,8.134 9.884,8.075 10.2,8.075 10.375,7.9 R9.1@10.375,7.875 ; U1.C3@10.9,12.1 v1(11.3,11.7)
  L3_DQ_ADDR w0.1: v1(10.025,9.225) 10.025,9.234 9.825,9.434 9.825,9.504 9.825,10.142 10.083,10.4 11.554,10.4 11.578,10.4 11.85,10.672 11.85,11.128 11.578,11.4 11.412,11.4 11.354,11.459 11.354,11.646 v1(11.3,11.7)
NetR10_1: R10.1 U1.B3 | length 6.7
  Top Layer 1 w0.1: R10.1@9.075,7.875 9.075,7.9 9.25,8.075 9.566,8.075 9.625,8.134 9.625,8.633 9.625,9.016 9.425,9.216 v1(9.425,9.225) ; U1.B3@10.9,11.3 v1(11.3,10.9)
  L3_DQ_ADDR w0.1: v1(9.425,9.225) 9.425,9.234 9.625,9.434 9.625,10.225 9.676,10.276 10,10.6 11.435,10.6 11.495,10.6 11.65,10.755 11.65,11.045 11.495,11.2 11.412,11.2 11.354,11.141 11.354,10.954 v1(11.3,10.9)
NetR11_1: R11.1 U1.A7 | length 6
  Top Layer 1 w0.1: v1(7.3,10.1) U1.A7@7.7,10.5 8.45,9.75 R11.1@8.45,5.375
NetR12_1: R12.1 U1.D8 | length 5.9
  Top Layer 1 w0.1: v1(5.325,9.125) 5.9,8.55 R12.1@5.9,7.875 ; v1(6.5,12.5) U1.D8@6.9,12.9
  L3_DQ_ADDR w0.1: v1(5.325,9.125) 5.325,11.325 v1(6.5,12.5)
NetR13_1: R13.1 U2.B9 | length 0.6
  Top Layer 1 w0.1: v1(16.63,10.9) U2.B9@17.03,11.3
NetR14_1: R14.1 U2.C2 | length 0.6
  Top Layer 1 w0.1: U2.C2@22.63,12.1 v1(23.03,11.7)
NetR15_1: R15.1 U2.B7 | length 0.6
  Top Layer 1 w0.1: v1(18.23,10.9) U2.B7@18.63,11.3
NetR16_1: R16.1 U2.D3 | length 0.6
  Top Layer 1 w0.1: U2.D3@21.83,12.9 v1(22.23,12.5)
NetR17_1: R17.1 U2.D7 | length 0.6
  Top Layer 1 w0.1: v1(18.23,12.5) U2.D7@18.63,12.9
NetR18_1: R18.1 U2.D2 | length 0.6
  Top Layer 1 w0.1: U2.D2@22.63,12.9 v1(23.03,12.5)
NetR19_1: R19.1 U2.E3 | length 0.6
  Top Layer 1 w0.1: U2.E3@21.83,13.7 v1(22.23,13.3)
NetR20_1: R20.1 U2.E7 | length 0.6
  Top Layer 1 w0.1: v1(18.23,13.3) U2.E7@18.63,13.7
NetR21_1: R21.1 U2.C3 | length 8.2
  Top Layer 1 w0.1: v1(19.375,9.25) 19.375,9.241 19.175,9.041 19.175,8.563 19.175,8.134 19.234,8.075 19.55,8.075 19.725,7.9 R21.1@19.725,7.875 ; U2.C3@21.83,12.1 v1(22.23,11.7)
  L3_DQ_ADDR w0.1: v1(19.375,9.25) 19.375,9.259 19.175,9.459 19.175,9.545 19.668,10.038 22.146,10.038 22.78,10.672 22.78,11.128 22.508,11.4 22.342,11.4 22.284,11.459 22.284,11.646 v1(22.23,11.7)
NetR22_1: R22.1 U2.B3 | length 8.2
  Top Layer 1 w0.1: R22.1@18.425,7.875 18.425,7.9 18.6,8.075 18.916,8.075 18.975,8.134 18.975,8.645 18.975,9.041 18.775,9.241 v1(18.775,9.25) ; U2.B3@21.83,11.3 v1(22.23,10.9)
  L3_DQ_ADDR w0.1: v1(18.775,9.25) 18.775,9.259 18.975,9.459 18.975,9.628 19.585,10.238 20.535,10.238 20.615,10.318 20.615,10.417 20.695,10.497 20.935,10.497 21.015,10.417 21.015,10.318 21.095,10.238 22.063,10.238 22.58,10.755 22.58,11.045 22.425,11.2 22.342,11.2 22.284,11.141 22.284,10.954 v1(22.23,10.9)
NetR23_1: R23.1 U2.A7 | length 0.6
  Top Layer 1 w0.1: v1(18.23,10.1) U2.A7@18.63,10.5
NetR24_1: R24.1 U2.D8 | length 8
  Top Layer 1 w0.1: R24.1@15.25,7.875 v1(15.25,8.475) ; v1(17.43,12.5) U2.D8@17.83,12.9
  L3_DQ_ADDR w0.1: v1(15.25,8.475) 15.25,8.8 15.25,8.85 ccw(c15.05,8.85) 15.05,9.05 14.664,9.05 cw(c14.664,9.25) 14.664,9.45 15.45,9.45 ccw(c15.45,9.65) 15.45,9.85 cw(c15.45,10.05) 15.25,10.05 15.25,10.32 16.28,11.35 v1(17.43,12.5)
NetR25_1: R25.1 U3.B9 | length 0.6
  Top Layer 1 w0.1: v1(27.56,10.9) U3.B9@27.96,11.3
NetR26_1: R26.1 U3.C2 | length 0.6
  Top Layer 1 w0.1: U3.C2@33.56,12.1 v1(33.96,11.7)
NetR27_1: R27.1 U3.B7 | length 0.6
  Top Layer 1 w0.1: v1(29.16,10.9) U3.B7@29.56,11.3
NetR28_1: R28.1 U3.D3 | length 0.6
  Top Layer 1 w0.1: U3.D3@32.76,12.9 v1(33.16,12.5)
NetR29_1: R29.1 U3.D7 | length 0.6
  Top Layer 1 w0.1: v1(29.16,12.5) U3.D7@29.56,12.9
NetR30_1: R30.1 U3.D2 | length 0.6
  Top Layer 1 w0.1: U3.D2@33.56,12.9 v1(33.96,12.5)
NetR31_1: R31.1 U3.E3 | length 0.6
  Top Layer 1 w0.1: U3.E3@32.76,13.7 v1(33.16,13.3)
NetR32_1: R32.1 U3.E7 | length 0.6
  Top Layer 1 w0.1: v1(29.16,13.3) U3.E7@29.56,13.7
NetR33_1: R33.1 U3.C3 | length 8.1
  Top Layer 1 w0.1: R33.1@29.075,7.875 29.075,7.9 28.9,8.075 28.584,8.075 28.525,8.134 28.525,8.216 29.534,9.225 30.116,9.225 30.316,9.025 v1(30.325,9.025) ; U3.C3@32.76,12.1 v1(33.16,11.7)
  L3_DQ_ADDR w0.1: v1(30.325,9.025) 30.334,9.025 30.534,9.225 30.703,9.225 31.88,10.402 31.88,10.915 32.915,11.95 32.998,11.95 33.056,11.891 33.056,11.885 33.16,11.781 v1(33.16,11.7)
NetR34_1: R34.1 U3.B3 | length 9.9
  Top Layer 1 w0.1: R34.1@27.775,7.875 27.775,7.9 27.95,8.075 28.266,8.075 28.325,8.134 28.325,8.299 29.451,9.425 30.116,9.425 30.316,9.625 v1(30.325,9.625) ; U3.B3@32.76,11.3 v1(33.16,10.9)
  L3_DQ_ADDR w0.1: v1(30.325,9.625) 30.334,9.625 30.534,9.425 30.62,9.425 31.68,10.485 31.68,10.997 32.832,12.15 33.205,12.15 33.51,11.845 33.51,11.555 33.205,11.25 33.205,10.945 v1(33.16,10.9)
NetR35_1: R35.1 U3.A7 | length 0.6
  Top Layer 1 w0.1: v1(29.16,10.1) U3.A7@29.56,10.5
NetR36_1: R36.1 U3.D8 | length 0.6
  Top Layer 1 w0.1: v1(28.36,12.5) U3.D8@28.76,12.9
NetR37_1: R37.1 U4.B9 | length 0.6
  Top Layer 1 w0.1: v1(38.49,10.9) U4.B9@38.89,11.3
NetR38_1: R38.1 U4.C2 | length 0.6
  Top Layer 1 w0.1: U4.C2@44.49,12.1 v1(44.89,11.7)
NetR39_1: R39.1 U4.B7 | length 0.6
  Top Layer 1 w0.1: v1(40.09,10.9) U4.B7@40.49,11.3
NetR40_1: R40.1 U4.D3 | length 0.6
  Top Layer 1 w0.1: U4.D3@43.69,12.9 v1(44.09,12.5)
NetR41_1: R41.1 U4.D7 | length 0.6
  Top Layer 1 w0.1: v1(40.09,12.5) U4.D7@40.49,12.9
NetR42_1: R42.1 U4.D2 | length 0.6
  Top Layer 1 w0.1: U4.D2@44.49,12.9 v1(44.89,12.5)
NetR43_1: R43.1 U4.E3 | length 0.6
  Top Layer 1 w0.1: U4.E3@43.69,13.7 v1(44.09,13.3)
NetR44_1: R44.1 U4.E7 | length 0.6
  Top Layer 1 w0.1: v1(40.09,13.3) U4.E7@40.49,13.7
NetR45_1: R45.1 U4.C3 | length 10.6
  Top Layer 1 w0.1: R45.1@38.425,7.875 38.425,7.9 38.25,8.075 37.934,8.075 37.875,8.134 37.875,8.216 38.959,9.3 40.966,9.3 41.166,9.1 v1(41.175,9.1) ; U4.C3@43.69,12.1 v1(44.09,11.7)
  L3_DQ_ADDR w0.1: v1(41.175,9.1) 41.184,9.1 41.384,9.3 43.268,9.3 44.64,10.672 44.64,11.128 44.368,11.4 44.202,11.4 44.144,11.459 44.144,11.646 v1(44.09,11.7)
NetR46_1: R46.1 U4.B3 | length 10.6
  Top Layer 1 w0.1: R46.1@37.125,7.875 37.125,7.9 37.3,8.075 37.616,8.075 37.675,8.134 37.675,8.299 38.876,9.5 39.601,9.5 39.681,9.58 39.681,9.679 39.761,9.759 40.001,9.759 40.081,9.679 40.081,9.58 40.161,9.5 40.966,9.5 41.166,9.7 v1(41.175,9.7) ; U4.B3@43.69,11.3 v1(44.09,10.9)
  L3_DQ_ADDR w0.1: v1(41.175,9.7) 41.184,9.7 41.384,9.5 43.185,9.5 44.44,10.755 44.44,11.045 44.285,11.2 44.202,11.2 44.144,11.141 44.144,10.954 v1(44.09,10.9)
NetR47_1: R47.1 U4.A7 | length 0.6
  Top Layer 1 w0.1: v1(40.09,10.1) U4.A7@40.49,10.5
NetR48_1: R48.1 U4.D8 | length 0.6
  Top Layer 1 w0.1: v1(39.29,12.5) U4.D8@39.69,12.9
NetR49_1: R49.1 U5.B9 | length 0.6
  Top Layer 1 w0.1: v1(84.31,10.9) U5.B9@84.71,11.3
NetR50_1: R50.1 U5.C2 | length 0.6
  Top Layer 1 w0.1: U5.C2@90.31,12.1 v1(90.71,11.7)
NetR51_1: R51.1 U5.B7 | length 0.6
  Top Layer 1 w0.1: v1(85.91,10.9) U5.B7@86.31,11.3
NetR52_1: R52.1 U5.D3 | length 0.6
  Top Layer 1 w0.1: U5.D3@89.51,12.9 v1(89.91,12.5)
NetR53_1: R53.1 U5.D7 | length 0.6
  Top Layer 1 w0.1: v1(85.91,12.5) U5.D7@86.31,12.9
NetR54_1: R54.1 U5.D2 | length 0.6
  Top Layer 1 w0.1: U5.D2@90.31,12.9 v1(90.71,12.5)
NetR55_1: R55.1 U5.E3 | length 0.6
  Top Layer 1 w0.1: U5.E3@89.51,13.7 v1(89.91,13.3)
NetR56_1: R56.1 U5.E7 | length 0.6
  Top Layer 1 w0.1: v1(85.91,13.3) U5.E7@86.31,13.7
NetR57_1: R57.1 U5.C3 | length 7.9
  Top Layer 1 w0.1: U5.C3@89.51,12.1 v1(89.91,11.7) ; v1(90.325,9.7) 90.334,9.7 90.534,9.5 91.924,9.5 93.125,8.299 93.125,8.134 93.184,8.075 93.5,8.075 93.675,7.9 R57.1@93.675,7.875
  L3_DQ_ADDR w0.1: v1(89.91,11.7) 89.964,11.646 89.964,11.459 90.022,11.4 90.188,11.4 90.46,11.128 90.46,10.487 89.971,9.999 89.971,9.559 90.03,9.5 90.116,9.5 90.316,9.7 v1(90.325,9.7)
NetR58_1: R58.1 U5.B3 | length 7.9
  Top Layer 1 w0.1: U5.B3@89.51,11.3 v1(89.91,10.9) ; v1(90.325,9.1) 90.334,9.1 90.534,9.3 91.841,9.3 92.177,8.964 92.177,8.851 92.107,8.781 92.107,8.668 92.277,8.498 92.39,8.498 92.46,8.568 92.573,8.568 92.925,8.216 92.925,8.134 92.866,8.075 92.55,8.075 92.375,7.9 R58.1@92.375,7.875
  L3_DQ_ADDR w0.1: v1(89.91,10.9) 89.964,10.954 89.964,11.141 90.022,11.2 90.105,11.2 90.26,11.045 90.26,10.57 89.771,10.082 89.771,9.476 89.947,9.3 90.116,9.3 90.316,9.1 v1(90.325,9.1)
NetR59_1: R59.1 U5.A7 | length 0.6
  Top Layer 1 w0.1: v1(85.91,10.1) U5.A7@86.31,10.5
NetR60_1: R60.1 U5.D8 | length 0.6
  Top Layer 1 w0.1: v1(85.11,12.5) U5.D8@85.51,12.9
NetR61_1: R61.1 U6.B9 | length 0.6
  Top Layer 1 w0.1: v1(95.24,10.9) U6.B9@95.64,11.3
NetR62_1: R62.1 U6.C2 | length 0.6
  Top Layer 1 w0.1: U6.C2@101.24,12.1 v1(101.64,11.7)
NetR63_1: R63.1 U6.B7 | length 0.6
  Top Layer 1 w0.1: v1(96.84,10.9) U6.B7@97.24,11.3
NetR64_1: R64.1 U6.D3 | length 0.6
  Top Layer 1 w0.1: U6.D3@100.44,12.9 v1(100.84,12.5)
NetR65_1: R65.1 U6.D7 | length 0.6
  Top Layer 1 w0.1: v1(96.84,12.5) U6.D7@97.24,12.9
NetR66_1: R66.1 U6.D2 | length 0.6
  Top Layer 1 w0.1: U6.D2@101.24,12.9 v1(101.64,12.5)
NetR67_1: R67.1 U6.E3 | length 0.6
  Top Layer 1 w0.1: U6.E3@100.44,13.7 v1(100.84,13.3)
NetR68_1: R68.1 U6.E7 | length 0.6
  Top Layer 1 w0.1: v1(96.84,13.3) U6.E7@97.24,13.7
NetR69_1: R69.1 U6.C3 | length 6
  Top Layer 1 w0.1: U6.C3@100.44,12.1 v1(100.84,11.7) ; v1(101.474,9.774) 101.48,9.768 101.48,9.485 102.475,8.491 102.475,8.134 102.534,8.075 102.85,8.075 103.025,7.9 R69.1@103.025,7.875
  L3_DQ_ADDR w0.1: v1(100.84,11.7) 100.894,11.646 100.894,11.459 100.952,11.4 101.118,11.4 101.39,11.128 101.39,10.552 101.124,10.286 101.124,9.841 101.185,9.78 101.468,9.78 v1(101.474,9.774)
NetR70_1: R70.1 U6.B3 | length 6
  Top Layer 1 w0.1: U6.B3@100.44,11.3 v1(100.84,10.9) ; v1(101.05,9.35) 101.056,9.344 101.339,9.344 101.604,9.079 101.604,8.966 101.534,8.896 101.534,8.782 101.704,8.613 101.817,8.613 101.887,8.683 102,8.683 102.275,8.408 102.275,8.134 102.216,8.075 101.9,8.075 101.725,7.9 R70.1@101.725,7.875
  L3_DQ_ADDR w0.1: v1(100.84,10.9) 100.894,10.954 100.894,11.141 100.952,11.2 101.035,11.2 101.19,11.045 101.19,10.635 100.924,10.369 100.924,9.759 101.044,9.639 101.044,9.356 v1(101.05,9.35)
NetR71_1: R71.1 U6.A7 | length 0.6
  Top Layer 1 w0.1: v1(96.84,10.1) U6.A7@97.24,10.5
NetR72_1: R72.1 U6.D8 | length 0.6
  Top Layer 1 w0.1: v1(96.04,12.5) U6.D8@96.44,12.9
NetR73_1: R73.1 U7.B9 | length 0.6
  Top Layer 1 w0.1: v1(106.17,10.9) U7.B9@106.57,11.3
NetR74_1: R74.1 U7.C2 | length 0.6
  Top Layer 1 w0.1: U7.C2@112.17,12.1 v1(112.57,11.7)
NetR75_1: R75.1 U7.B7 | length 0.6
  Top Layer 1 w0.1: v1(107.77,10.9) U7.B7@108.17,11.3
NetR76_1: R76.1 U7.D3 | length 0.6
  Top Layer 1 w0.1: U7.D3@111.37,12.9 v1(111.77,12.5)
NetR77_1: R77.1 U7.D7 | length 0.6
  Top Layer 1 w0.1: v1(107.77,12.5) U7.D7@108.17,12.9
NetR78_1: R78.1 U7.D2 | length 0.6
  Top Layer 1 w0.1: U7.D2@112.17,12.9 v1(112.57,12.5)
NetR79_1: R79.1 U7.E3 | length 0.6
  Top Layer 1 w0.1: U7.E3@111.37,13.7 v1(111.77,13.3)
NetR80_1: R80.1 U7.E7 | length 0.6
  Top Layer 1 w0.1: v1(107.77,13.3) U7.E7@108.17,13.7
NetR81_1: R81.1 U7.C3 | length 5.5
  Top Layer 1 w0.1: U7.C3@111.37,12.1 v1(111.77,11.7) ; v1(112.025,9.175) 112.025,9.166 111.825,8.966 111.825,8.525 111.825,8.134 111.884,8.075 112.2,8.075 112.375,7.9 R81.1@112.375,7.875
  L3_DQ_ADDR w0.1: v1(111.77,11.7) 111.824,11.646 111.824,11.459 111.882,11.4 112.048,11.4 112.32,11.128 112.32,10.299 111.825,9.804 111.825,9.384 112.025,9.184 v1(112.025,9.175)
NetR82_1: R82.1 U7.B3 | length 5.2
  Top Layer 1 w0.1: R82.1@111.075,7.875 111.075,7.9 111.25,8.075 111.566,8.075 111.625,8.134 111.625,8.608 111.625,8.966 111.425,9.166 v1(111.425,9.175) ; U7.B3@111.37,11.3 v1(111.77,10.9)
  L3_DQ_ADDR w0.1: v1(111.425,9.175) 111.425,9.184 111.625,9.384 111.625,9.887 112.12,10.382 112.12,11.045 111.965,11.2 111.882,11.2 111.824,11.141 111.824,10.954 v1(111.77,10.9)
NetR83_1: R83.1 U7.A7 | length 0.6
  Top Layer 1 w0.1: v1(107.77,10.1) U7.A7@108.17,10.5
NetR84_1: R84.1 U7.D8 | length 0.6
  Top Layer 1 w0.1: v1(106.97,12.5) U7.D8@107.37,12.9
NetR85_1: R85.1 U8.B9 | length 0.6
  Top Layer 1 w0.1: v1(117.1,10.9) U8.B9@117.5,11.3
NetR86_1: R86.1 U8.C2 | length 0.6
  Top Layer 1 w0.1: U8.C2@123.1,12.1 v1(123.5,11.7)
NetR87_1: R87.1 U8.B7 | length 0.6
  Top Layer 1 w0.1: v1(118.7,10.9) U8.B7@119.1,11.3
NetR88_1: R88.1 U8.D3 | length 0.6
  Top Layer 1 w0.1: U8.D3@122.3,12.9 v1(122.7,12.5)
NetR89_1: R89.1 U8.D7 | length 0.6
  Top Layer 1 w0.1: v1(118.7,12.5) U8.D7@119.1,12.9
NetR90_1: R90.1 U8.D2 | length 0.6
  Top Layer 1 w0.1: U8.D2@123.1,12.9 v1(123.5,12.5)
NetR91_1: R91.1 U8.E3 | length 0.6
  Top Layer 1 w0.1: U8.E3@122.3,13.7 v1(122.7,13.3)
NetR92_1: R92.1 U8.E7 | length 0.6
  Top Layer 1 w0.1: v1(118.7,13.3) U8.E7@119.1,13.7
NetR93_1: R93.1 U8.C3 | length 6.5
  Top Layer 1 w0.1: R93.1@121.725,7.875 121.725,7.9 121.55,8.075 121.234,8.075 121.175,8.134 121.175,8.216 121.642,8.683 122.15,8.683 122.611,9.144 122.894,9.144 v1(122.9,9.15) ; U8.C3@122.3,12.1 v1(122.7,11.7)
  L3_DQ_ADDR w0.1: v1(122.7,11.7) 122.754,11.646 122.754,11.459 122.812,11.4 122.978,11.4 123.25,11.128 123.25,9.783 122.906,9.439 122.906,9.156 v1(122.9,9.15)
NetR94_1: R94.1 U8.B3 | length 6.5
  Top Layer 1 w0.1: R94.1@120.425,7.875 120.425,7.9 120.6,8.075 120.916,8.075 120.975,8.134 120.975,8.299 121.559,8.883 122.068,8.883 122.47,9.285 122.47,9.568 v1(122.476,9.574) ; U8.B3@122.3,11.3 v1(122.7,10.9)
  L3_DQ_ADDR w0.1: v1(122.476,9.574) 122.482,9.58 122.765,9.58 123.05,9.866 123.05,10.166 122.97,10.246 122.871,10.246 122.791,10.326 122.791,10.566 122.871,10.646 122.97,10.646 123.05,10.726 123.05,11.045 122.895,11.2 122.812,11.2 122.754,11.141 122.754,10.954 v1(122.7,10.9)
NetR95_1: R95.1 U8.A7 | length 0.6
  Top Layer 1 w0.1: v1(118.7,10.1) U8.A7@119.1,10.5
NetR96_1: R96.1 U8.D8 | length 0.6
  Top Layer 1 w0.1: v1(117.9,12.5) U8.D8@118.3,12.9
ODT: J1.87 R107.1 U1.F3 U2.F3 U3.F3 U4.F3 U5.F3 U6.F3 U7.F3 U8.F3 | length 4.5
  Top Layer 1 w0.075: U1.F3@10.9,14.5 v1(11.3,14.1) ; U2.F3@21.83,14.5 v1(22.23,14.1) ; U3.F3@32.76,14.5 v1(33.16,14.1) ; U4.F3@43.69,14.5 v1(44.09,14.1) ; U5.F3@89.51,14.5 v1(89.91,14.1) ; U6.F3@100.44,14.5 v1(100.84,14.1) ; U7.F3@111.37,14.5 v1(111.77,14.1) ; U8.F3@122.3,14.5 v1(122.7,14.1)
PAR: J1.222 R126.1 U1.N3 U2.N3 U3.N3 U4.N3 U5.N3 U6.N3 U7.N3 U8.N3 | length 4.5
  Top Layer 1 w0.075: U1.N3@10.9,20.1 v1(11.3,20.5) ; U2.N3@21.83,20.1 v1(22.23,20.5) ; U3.N3@32.76,20.1 v1(33.16,20.5) ; U4.N3@43.69,20.1 v1(44.09,20.5) ; U5.N3@89.51,20.1 v1(89.91,20.5) ; U6.N3@100.44,20.1 v1(100.84,20.5) ; U7.N3@111.37,20.1 v1(111.77,20.5) ; U8.N3@122.3,20.1 v1(122.7,20.5)
RESET_N: J1.58 U1.L1 U2.L1 U3.L1 U4.L1 U5.L1 U6.L1 U7.L1 U8.L1 | length 4.5
  Top Layer 1 w0.075: U1.L1@12.5,18.5 v1(12.9,18.9) ; U2.L1@23.43,18.5 v1(23.83,18.9) ; U3.L1@34.36,18.5 v1(34.76,18.9) ; U4.L1@45.29,18.5 v1(45.69,18.9) ; U5.L1@91.11,18.5 v1(91.51,18.9) ; U6.L1@102.04,18.5 v1(102.44,18.9) ; U7.L1@112.97,18.5 v1(113.37,18.9) ; U8.L1@123.9,18.5 v1(124.3,18.9)
SA0: J1.139 U9.1
SA1: J1.140 U9.2
SA2: J1.238 U9.3
SCL: J1.141 U9.6
SDA: J1.285 U9.5
VDD: C1.2 C2.2 C3.2 C4.1 C7.2 C8.2 C9.2 C10.1 C13.2 C14.2 C15.2 C16.1 C19.2 C20.2 C21.2 C22.1 C25.2 C26.2 C27.2 C28.1 C31.2 C32.2 C33.2 C34.1 C37.2 C38.2 C39.2 C40.1 C43.2 C44.2 C45.2 C46.1 C50.2 C51.2 C52.2 C54.1 C55.2 C56.2 C57.1 C58.1 C59.1 C60.1 C61.1 C62.1 C63.1 C64.1 C65.1 C66.1 C67.1 C68.1 C69.1 C70.1 J1.59 J1.61 J1.64 J1.67 J1.70 J1.73 J1.76 J1.80 J1.83 J1.85 J1.88 J1.90 J1.92 J1.204 J1.206 J1.209 J1.212 J1.215 J1.217 J1.220 J1.223 J1.226 J1.229 J1.231 J1.233 J1.236 R102.2 U1.A1 U1.B2 U1.B8 U1.C1 U1.C7 U1.C9 U1.E2 U1.E8 U1.F1 U1.F9 U1.H1 U1.J9 U1.M1 U1.N9 U2.A1 U2.B2 U2.B8 U2.C1 U2.C7 U2.C9 U2.E2 U2.E8 U2.F1 U2.F9 U2.H1 U2.J9 U2.M1 U2.N9 U3.A1 U3.B2 U3.B8 U3.C1 U3.C7 U3.C9 U3.E2 U3.E8 U3.F1 U3.F9 U3.H1 U3.J9 U3.M1 U3.N9 U4.A1 U4.B2 U4.B8 U4.C1 U4.C7 U4.C9 U4.E2 U4.E8 U4.F1 U4.F9 U4.H1 U4.J9 U4.M1 U4.N9 U5.A1 U5.B2 U5.B8 U5.C1 U5.C7 U5.C9 U5.E2 U5.E8 U5.F1 U5.F9 U5.H1 U5.J9 U5.M1 U5.N9 U6.A1 U6.B2 U6.B8 U6.C1 U6.C7 U6.C9 U6.E2 U6.E8 U6.F1 U6.F9 U6.H1 U6.J9 U6.M1 U6.N9 U7.A1 U7.B2 U7.B8 U7.C1 U7.C7 U7.C9 U7.E2 U7.E8 U7.F1 U7.F9 U7.H1 U7.J9 U7.M1 U7.N9 U8.A1 U8.B2 U8.B8 U8.C1 U8.C7 U8.C9 U8.E2 U8.E8 U8.F1 U8.F9 U8.H1 U8.J9 U8.M1 U8.N9 | length 13
  Top Layer 1 w0.3: v2(5.7,20.5) U1.N9@6.1,20.1 ; U1.C7@7.7,12.1 7.991,12.1 v2(8.195,12.1) ; U1.A1@12.5,10.5 v2(12.9,10.1) ; v2(16.63,20.5) U2.N9@17.03,20.1 ; U2.C7@18.63,12.1 18.921,12.1 v2(19.125,12.1) ; U2.A1@23.43,10.5 v2(23.83,10.1) ; v2(27.56,20.5) U3.N9@27.96,20.1 ; U3.C7@29.56,12.1 29.851,12.1 v2(30.055,12.1) ; U3.A1@34.36,10.5 v2(34.76,10.1) ; v2(38.49,20.5) U4.N9@38.89,20.1 ; U4.C7@40.49,12.1 40.781,12.1 v2(40.985,12.1) ; U4.A1@45.29,10.5 v2(45.69,10.1) ; v2(84.31,20.5) U5.N9@84.71,20.1 ; U5.C7@86.31,12.1 86.601,12.1 v2(86.805,12.1) ; U5.A1@91.11,10.5 v2(91.51,10.1) ; v2(95.24,20.5) U6.N9@95.64,20.1 ; U6.C7@97.24,12.1 97.531,12.1 v2(97.735,12.1) ; U6.A1@102.04,10.5 v2(102.44,10.1) ; v2(106.17,20.5) U7.N9@106.57,20.1 ; U7.C7@108.17,12.1 108.461,12.1 v2(108.665,12.1) ; U7.A1@112.97,10.5 v2(113.37,10.1) ; v2(117.1,20.5) U8.N9@117.5,20.1 ; U8.C7@119.1,12.1 119.391,12.1 v2(119.595,12.1) ; U8.A1@123.9,10.5 v2(124.3,10.1)
VDDSPD: C49.2 J1.284 U9.8
VPP: C5.2 C6.2 C11.2 C12.2 C17.2 C18.2 C23.2 C24.2 C29.2 C30.2 C35.2 C36.2 C41.2 C42.2 C47.2 C48.2 C53.2 J1.142 J1.143 J1.286 J1.287 J1.288 U1.B1 U1.M9 U2.B1 U2.M9 U3.B1 U3.M9 U4.B1 U4.M9 U5.B1 U5.M9 U6.B1 U6.M9 U7.B1 U7.M9 U8.B1 U8.M9
VREFCA: C1.1 C7.1 C13.1 C19.1 C25.1 C31.1 C37.1 C43.1 C54.2 J1.146 U1.J1 U2.J1 U3.J1 U4.J1 U5.J1 U6.J1 U7.J1 U8.J1
VTT: C57.2 C58.2 C59.2 C60.2 C61.2 C62.2 C63.2 C64.2 C65.2 C66.2 C67.2 C68.2 C69.2 C70.2 J1.77 J1.221 R97.2 R98.2 R99.2 R100.2 R101.2 R103.2 R104.2 R105.2 R107.2 R108.2 R109.2 R110.2 R111.2 R112.2 R113.2 R114.2 R116.2 R118.2 R119.2 R120.2 R121.2 R122.2 R123.2 R124.2 R125.2 R126.2
WE: J1.228 R109.1 U1.H2 U2.H2 U3.H2 U4.H2 U5.H2 U6.H2 U7.H2 U8.H2 | length 4.5
  Top Layer 1 w0.075: U1.H2@11.7,16.1 v1(12.1,16.5) ; U2.H2@22.63,16.1 v1(23.03,16.5) ; U3.H2@33.56,16.1 v1(33.96,16.5) ; U4.H2@44.49,16.1 v1(44.89,16.5) ; U5.H2@90.31,16.1 v1(90.71,16.5) ; U6.H2@101.24,16.1 v1(101.64,16.5) ; U7.H2@112.17,16.1 v1(112.57,16.5) ; U8.H2@123.1,16.1 v1(123.5,16.5)
pads on no net: J1.1 J1.8 J1.19 J1.30 J1.41 J1.47 J1.49 J1.51 J1.52 J1.54 J1.56 J1.78 J1.89 J1.91 J1.93 J1.100 J1.111 J1.122 J1.133 J1.144 J1.145 J1.192 J1.194 J1.196 J1.197 J1.199 J1.201 J1.203 J1.205 J1.227 J1.230 J1.234 J1.235 J1.237 U1.A3 U1.F2 U1.G2 U1.G8 U1.N7 U2.A3 U2.F2 U2.G2 U2.G8 U2.N7 U3.A3 U3.F2 U3.G2 U3.G8 U3.N7 U4.A3 U4.F2 U4.G2 U4.G8 U4.N7 U5.A3 U5.F2 U5.G2 U5.G8 U5.N7 U6.A3 U6.F2 U6.G2 U6.G8 U6.N7 U7.A3 U7.F2 U7.G2 U7.G8 U7.N7 U8.A3 U8.F2 U8.G2 U8.G8 U8.N7 U9.7

## Polygon pours and split planes (outlines as drawn)
VDD on L4_VDD "L4_VDD_POUR" (solid, shelved, pour order 0): 0,1 133.35,1 133.35,31.25 0,31.25